# Altium PCB PCB1.PcbDoc (part 1 of 2)
Units mm, origin at the board's own origin, x right, y up, seen from the top; angles counter-clockwise.
Board outline 70 x 80 mm, 2 copper layers (Top Layer, Bottom Layer); 100 components, 100 nets, 458 pads, 124 vias.
Unrouted connection lines stored in the file: 1.
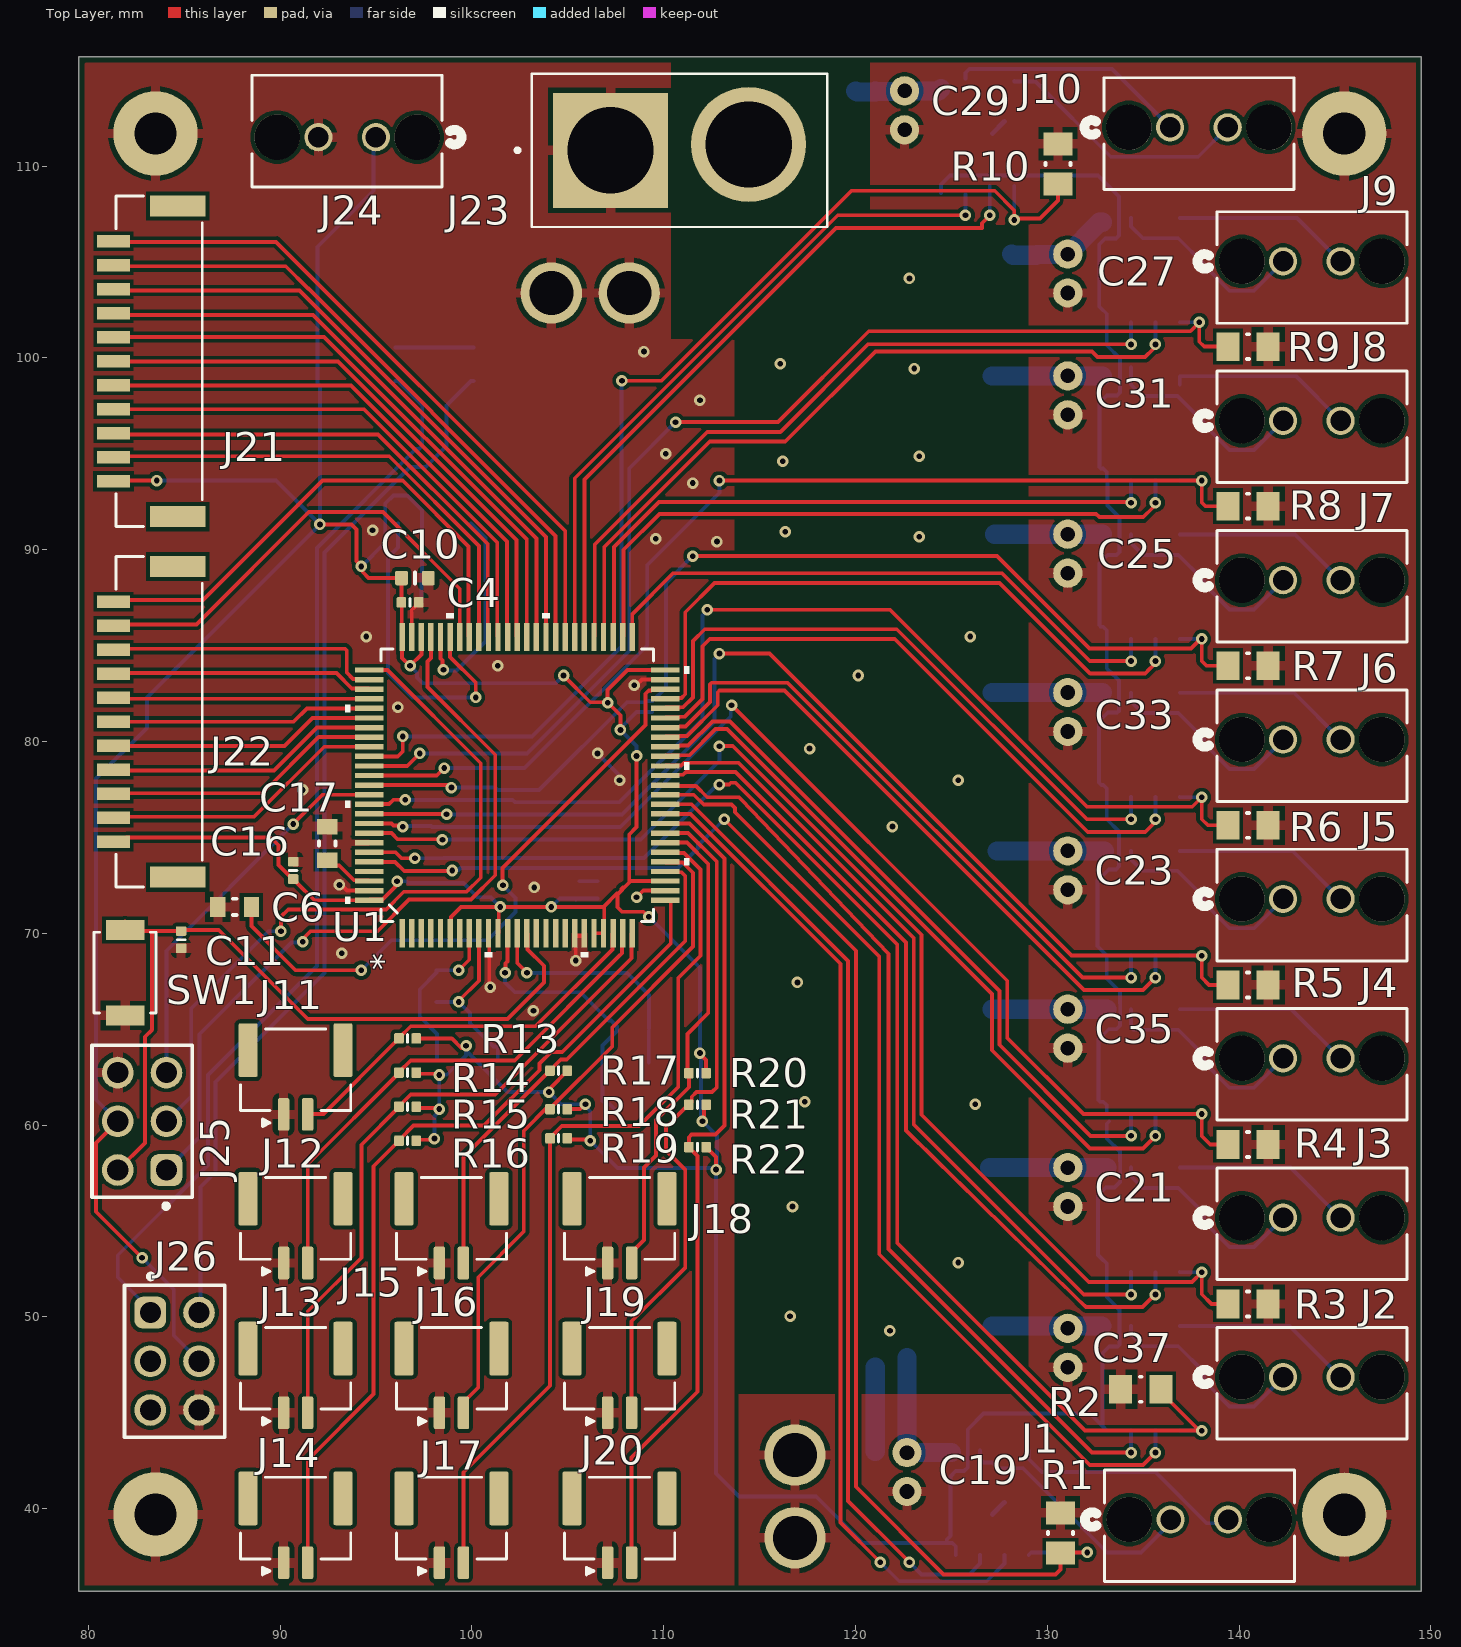
[diagram p0: Top Layer view]
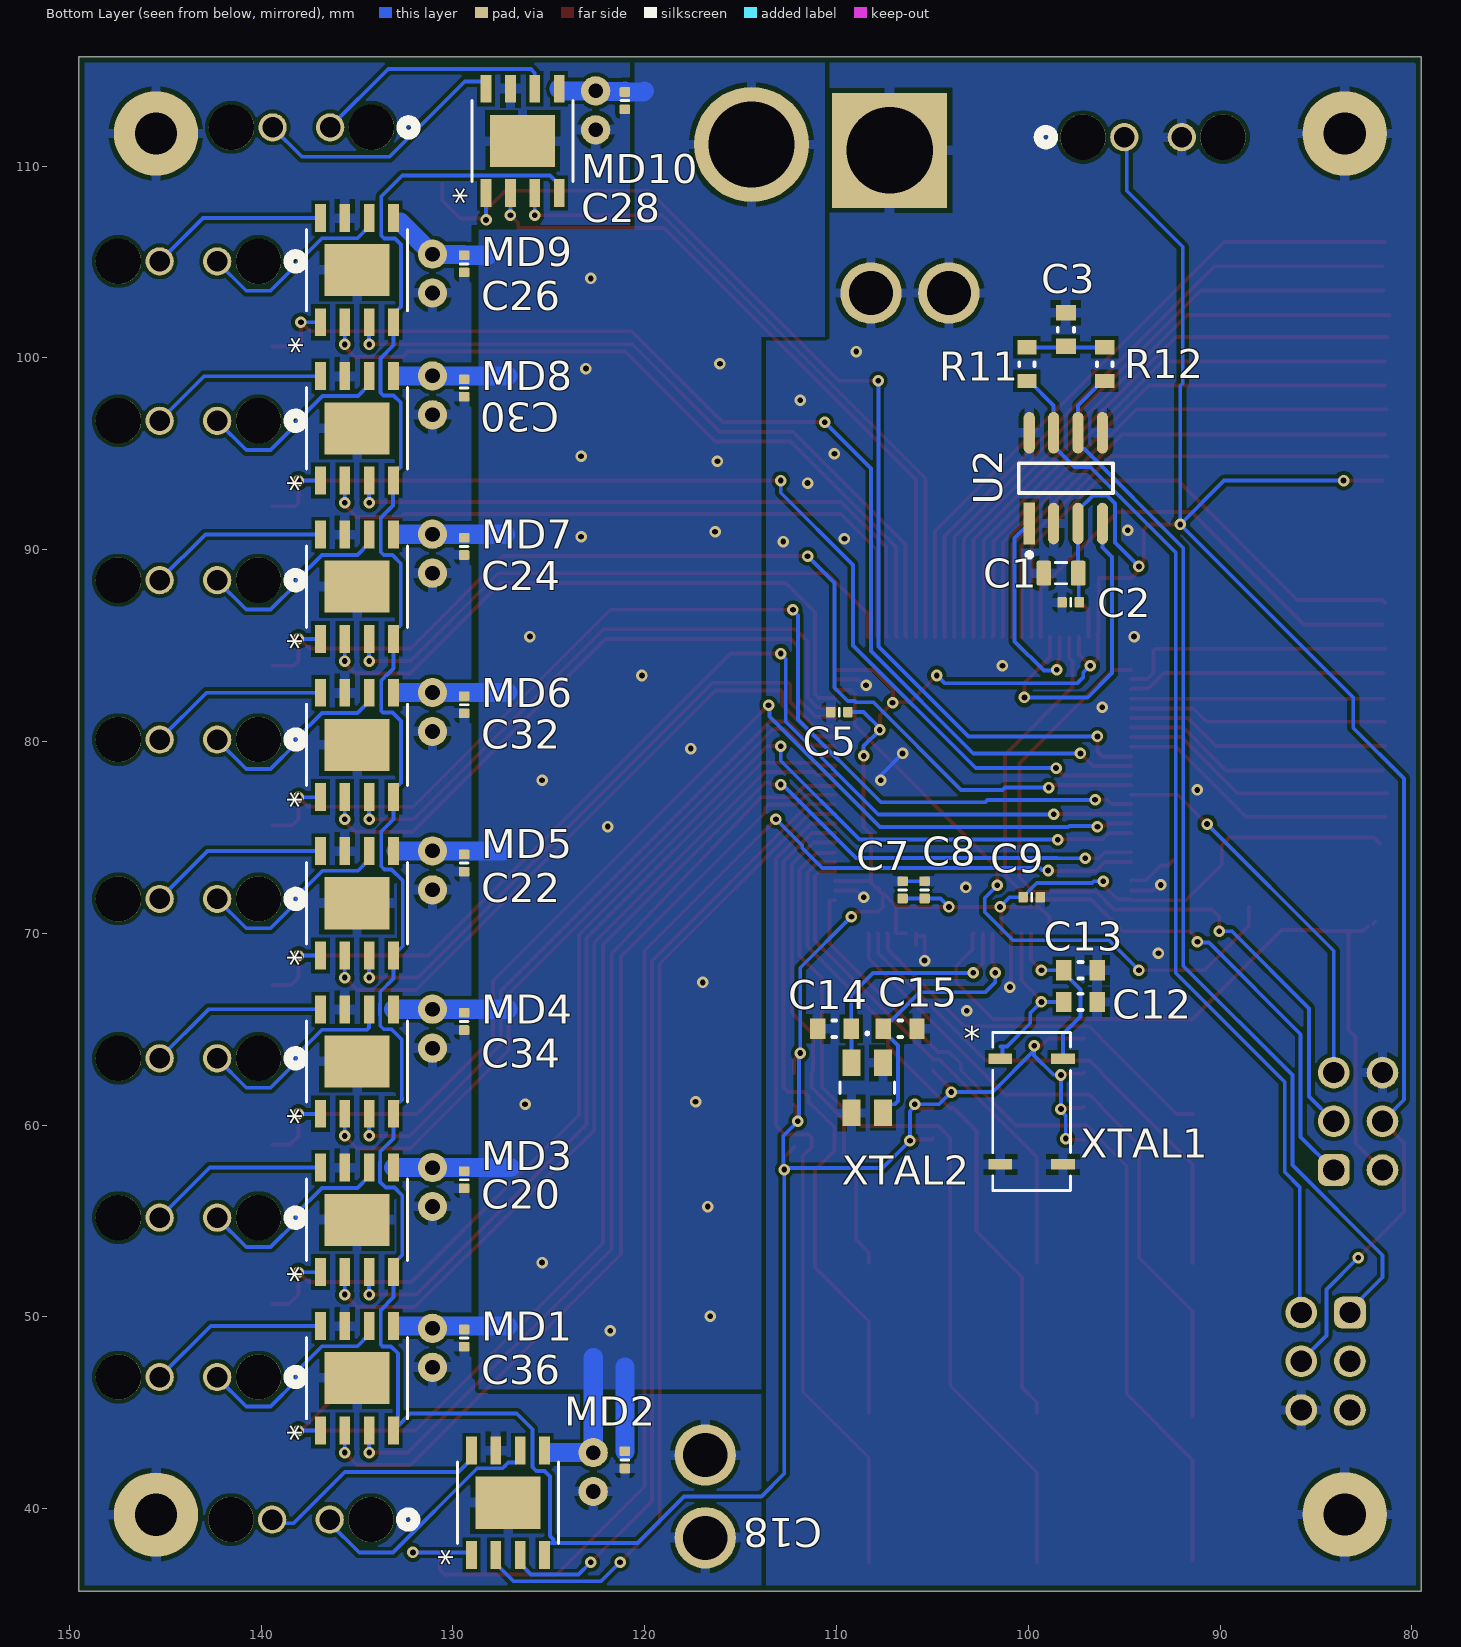
[diagram p1: Bottom Layer view, seen from below]
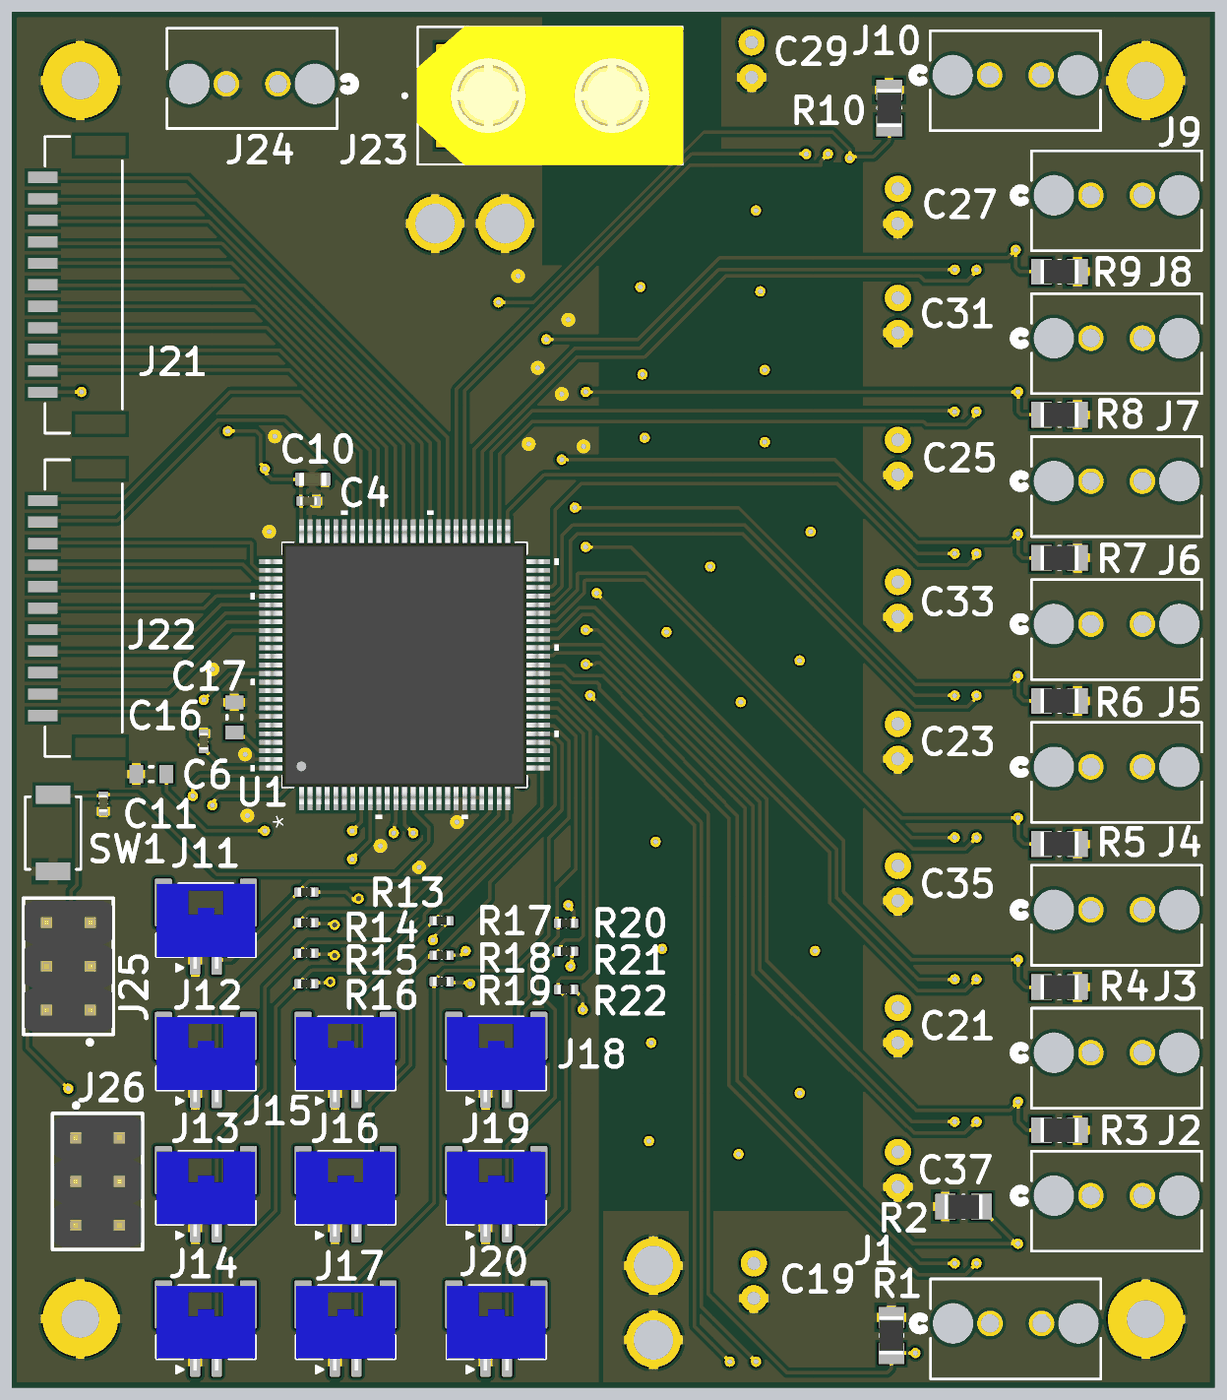
[diagram p3: 3D render of the assembled board from above, using the file's embedded part models]
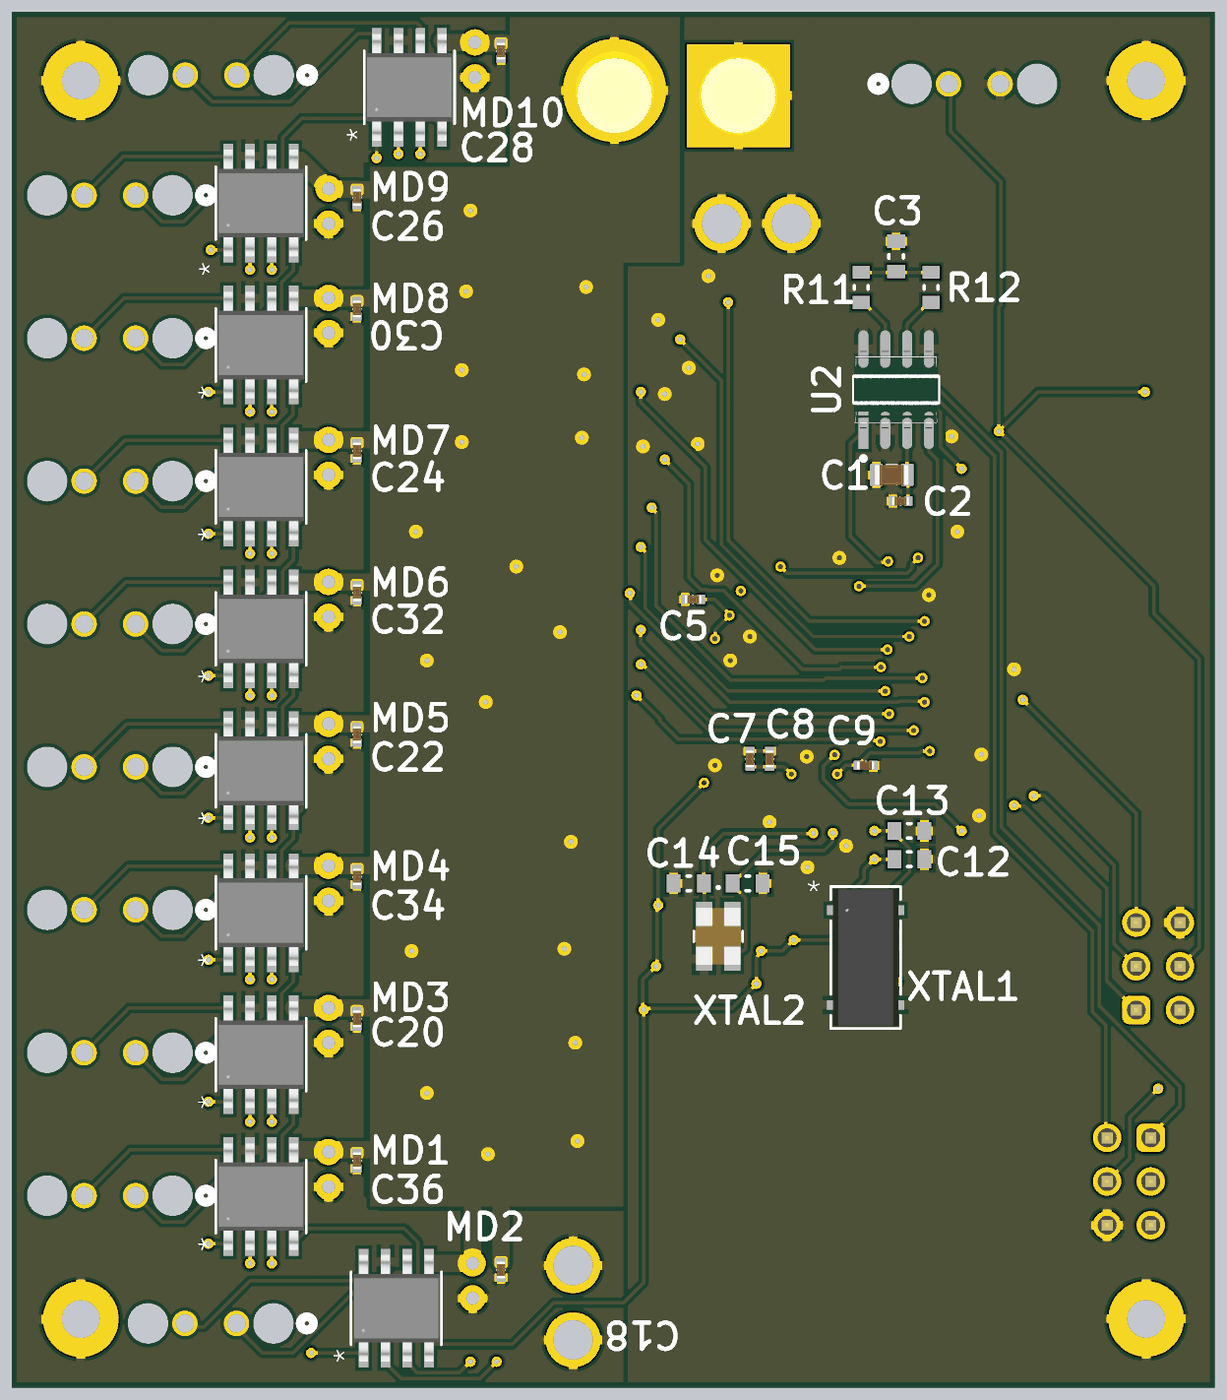
[diagram p4: 3D render of the assembled board from below, using the file's embedded part models]

## Layer stack, top to bottom
Top Solder: solder mask 0.0102, Solder Resist, Dk 3.5
Top Layer: signal copper 0.0356
Dielectric 1: dielectric 0.32, FR-4, Dk 4.8
Bottom Layer: signal copper 0.0356
Bottom Solder: solder mask 0.0102, Solder Resist, Dk 3.5

## Board outline
79.504,35.697 149.504,35.697 149.504,115.697 79.502,115.697

## Design rules (kind name [scope] priority, off if disabled: settings)
BoardOutlineClearance [All] p1: gap=0.3 ignorepadtopadclearanceinfootprint=FALSE except(0.4: Arc-SplitBarrior Arc-SplitContinuation Track-SplitBarrior Track-SplitContinuation SMDPad-SplitBarrior SMDPad-SplitContinuation THPad-SplitBarrior THPad-SplitContinuation Via-SplitBarrior Via-SplitContinuation Fill-SplitBarrior Fill-SplitContinuation Poly-SplitBarrior Poly-SplitContinuation Region-SplitBarrior Region-SplitContinuation Text-SplitBarrior Text-SplitContinuation)
Clearance "Clearance Different Nets" [All] p1: gap=0.2 ignorepadtopadclearanceinfootprint=FALSE except(0.1: Arc-Arc Arc-Track Arc-SMDPad Track-Track Track-SMDPad; 0.127: SMDPad-SMDPad SMDPad-Via THPad-Via Via-Via; 0.254: Arc-Via Arc-Text Track-Via Track-Text SMDPad-Text THPad-Text Via-Text Fill-Text Poly-Text Region-Text Text-Text; 0.5: THPad-THPad Via-Hole)
Clearance "Clearance Same Nets" [All] p2: gap=0.2 ignorepadtopadclearanceinfootprint=FALSE except(0.089: Arc-Arc Arc-Track Arc-SMDPad Track-Track Track-SMDPad SMDPad-SMDPad; 0.127: SMDPad-Via THPad-Via; 0.254: Arc-Via Arc-Text Track-Via Track-Text SMDPad-Text THPad-Text Via-Via Via-Text Fill-Text Poly-Text Region-Text Text-Text)
Clearance "Clearance Bottom Layer" [OnLayer('Bottom Layer')] p3: gap=0.203 ignorepadtopadclearanceinfootprint=TRUE except(0.254: Arc-Text Track-Text SMDPad-Text THPad-Text Via-Text Fill-Text Poly-Text Region-Text Text-Text)
Clearance "Clearance Top Layer" [OnLayer('Top Layer')] p4: gap=0.203 ignorepadtopadclearanceinfootprint=TRUE except(0.254: Arc-Text Track-Text SMDPad-Text THPad-Text Via-Text Fill-Text Poly-Text Region-Text Text-Text)
HoleSize [All] p1: absolutevalues=TRUE maxlimit=6.3 minlimit=0.3 maxpercent=80.000 minpercent=20.000
HoleToHoleClearance [All] p1: gap=0.25 allowstackedmicrovias=TRUE
MinimumAnnularRing [All] p1: minimumring=0.13
MinimumSolderMaskSliver [All] p1: minsoldermaskwidth=0
PolygonConnect PolygonConnect_1 [All] p1: thpad.connectstyle=Relief thpad.reliefconductorwidth=0.508 thpad.reliefentries=4 thpad.polygonreliefangle="90 Angle" thpad.airgapwidth=0.254 smdpad.connectstyle=Relief smdpad.reliefconductorwidth=0.508 smdpad.reliefentries=4 smdpad.polygonreliefangle="90 Angle" smdpad.airgapwidth=0.254 via.connectstyle=Direct via.reliefconductorwidth=0.508 via.reliefentries=4 via.polygonreliefangle="90 Angle" via.airgapwidth=0.254
RoutingCorners [All] p1: cornerstyle=Round minsetback=2.54 maxsetback=2.54
RoutingVias [All] p1: holewidth=0.3 width=0.6 viastyle="Through Hole" minholewidth=0.1 minwidth=0.5 maxholewidth=1 maxwidth=2
SilkToSilkClearance [All] p1: silktosilkclearance=0.1
SilkToSolderMaskClearance [IsPad] p1: minsilkscreentomaskgap=0.1 clearancetoexposedcopper=TRUE
SolderMaskExpansion [All] p1: expansion=0.102 istentingtop=FALSE
SupplyNets "Schematic Supply Nets_5" [InNet('12Va')] p1: voltage=0.000
SupplyNets "Schematic Supply Nets_3" [InNet('3.3V')] p2: voltage=0.000
SupplyNets "Schematic Supply Nets_2" [InNet('12V')] p3: voltage=0.000
SupplyNets "Schematic Supply Nets_1" [InNet('GND')] p4: voltage=0.000
SupplyNets "Schematic Supply Nets" [InNet('5V')] p5: voltage=0.000
Width [All] p1: maxlimit=2.54 minlimit=0.089 preferedwidth=0.2
24 further rules are at their usual default settings.

## Components (designator, comment, footprint, x,y, rotation, side; value= is the part's Value field where it differs from the comment)
C1 "Capacitor 10µF +/-20% 25V 0805" CAPC0805(2012)145_L 98.298,88.773 r0 bottom value=10µF
C2 "Capacitor 100nF +/-20% 50V 0402" CAPC0402(1005)60_L 97.79,87.249 r0 bottom value=100nF
C3 "yageo CC0603KRX7R9BB472" CAPC1709X04N 98.044,101.473 r90 bottom value=4.7nF
C4 "Capacitor 100nF +/-20% 50V 0402" CAPC0402(1005)60_L 96.774,87.249 r0 top value=100nF
C5 "Capacitor 100nF +/-20% 50V 0402" CAPC0402(1005)60_L 109.855,81.534 r0 bottom value=100nF
C6 "Capacitor 100nF +/-20% 50V 0402" CAPC0402(1005)60_L 90.678,73.279 r90 top value=100nF
C7 "Capacitor 100nF +/-20% 50V 0402" CAPC0402(1005)60_L 106.553,72.263 r90 bottom value=100nF
C8 "Capacitor 100nF +/-20% 50V 0402" CAPC0402(1005)60_L 105.41,72.263 r90 bottom value=100nF
C9 "Capacitor 100nF +/-20% 50V 0402" CAPC0402(1005)60_L 99.822,71.882 r180 bottom value=100nF
C10 "Capacitor 4.7µF +/-20% 10V 0603" CAPC0603(1608)100_L 97.028,88.519 r180 top value=4.7µF
C11 "Capacitor 100nF +/-20% 50V 0402" CAPC0402(1005)60_L 84.836,69.665 r90 top value=100nF
C12 "Yageo CC0603CRNPO9BN6R0" CAPC1709X04N 97.282,66.421 r180 bottom value=6pF
C13 "Yageo CC0603CRNPO9BN6R0" CAPC1709X04N 97.282,68.072 r180 bottom value=6pF
C14 "Yageo CC0603JRNPO9BN160" CAPC1709X04N 110.109,65.024 r0 bottom value=16pF
C15 "Yageo CC0603JRNPO9BN160" CAPC1709X04N 106.68,65.024 r0 bottom value=16pF
C16 "yageo CC0603KRX5R8BB225" CAPC1709X04N 87.63,71.374 r180 top value=2.2µF
C17 "yageo CC0603KRX5R8BB225" CAPC1709X04N 92.456,74.676 r90 top value=2.2µF
C18 "Capacitor 100nF +/-20% 50V 0402" CAPC0402(1005)60_L 121.031,42.545 r270 bottom value=100nF
C19 "N18F1D473MQ0T0S0N0" N18F1D473MQ0T0S0N0-Footprint-1 122.682,40.894 r90 top value=47µF
C20 "Capacitor 100nF +/-20% 50V 0402" CAPC0402(1005)60_L 129.413,57.15 r270 bottom value=100nF
C21 "N18F1D473MQ0T0S0N0" N18F1D473MQ0T0S0N0-Footprint-1 131.064,55.753 r90 top value=47µF
C22 "Capacitor 100nF +/-20% 50V 0402" CAPC0402(1005)60_L 129.413,73.66 r270 bottom value=100nF
C23 "N18F1D473MQ0T0S0N0" N18F1D473MQ0T0S0N0-Footprint-1 131.064,72.263 r90 top value=47µF
C24 "Capacitor 100nF +/-20% 50V 0402" CAPC0402(1005)60_L 129.413,90.17 r270 bottom value=100nF
C25 "N18F1D473MQ0T0S0N0" N18F1D473MQ0T0S0N0-Footprint-1 131.064,88.773 r90 top value=47µF
C26 "Capacitor 100nF +/-20% 50V 0402" CAPC0402(1005)60_L 129.413,104.902 r270 bottom value=100nF
C27 "N18F1D473MQ0T0S0N0" N18F1D473MQ0T0S0N0-Footprint-1 131.064,103.378 r90 top value=47µF
C28 "Capacitor 100nF +/-20% 50V 0402" CAPC0402(1005)60_L 121.031,113.411 r270 bottom value=100nF
C29 "N18F1D473MQ0T0S0N0" N18F1D473MQ0T0S0N0-Footprint-1 122.555,111.887 r90 top value=47µF
C30 "Capacitor 100nF +/-20% 50V 0402" CAPC0402(1005)60_L 129.413,98.425 r270 bottom value=100nF
C31 "N18F1D473MQ0T0S0N0" N18F1D473MQ0T0S0N0-Footprint-1 131.064,97.028 r90 top value=47µF
C32 "Capacitor 100nF +/-20% 50V 0402" CAPC0402(1005)60_L 129.413,81.915 r270 bottom value=100nF
C33 "N18F1D473MQ0T0S0N0" N18F1D473MQ0T0S0N0-Footprint-1 131.064,80.518 r90 top value=47µF
C34 "Capacitor 100nF +/-20% 50V 0402" CAPC0402(1005)60_L 129.413,65.405 r270 bottom value=100nF
C35 "N18F1D473MQ0T0S0N0" N18F1D473MQ0T0S0N0-Footprint-1 131.064,64.008 r90 top value=47µF
C36 "Capacitor 100nF +/-20% 50V 0402" CAPC0402(1005)60_L 129.413,48.895 r270 bottom value=100nF
C37 "N18F1D473MQ0T0S0N0" N18F1D473MQ0T0S0N0-Footprint-1 131.064,47.371 r90 top value=47µF
J1 "Molex 436500218" CONN_SD-43650-007_02_MOL 137.922,39.116 r180 top
J2 "Molex 436500218" CONN_SD-43650-007_02_MOL 143.788,46.544 r180 top
J3 "Molex 436500218" CONN_SD-43650-007_02_MOL 143.788,54.854 r180 top
J4 "Molex 436500218" CONN_SD-43650-007_02_MOL 143.788,63.163 r180 top
J5 "Molex 436500218" CONN_SD-43650-007_02_MOL 143.788,71.473 r180 top
J6 "Molex 436500218" CONN_SD-43650-007_02_MOL 143.788,79.782 r180 top
J7 "Molex 436500218" CONN_SD-43650-007_02_MOL 143.788,88.091 r180 top
J8 "Molex 436500218" CONN_SD-43650-007_02_MOL 143.788,96.401 r180 top
J9 "Molex 436500218" CONN_SD-43650-007_02_MOL 143.788,104.71 r180 top
J10 "Molex 436500218" CONN_SD-43650-007_02_MOL 137.898,111.695 r180 top
J11 "THERMISTOR1" JST-BM02B-GHS-TBT_V 90.805,62.23 r0 top
J12 "THERMISTOR2" JST-BM02B-GHS-TBT_V 90.805,54.483 r0 top
J13 "THERMISTOR3" JST-BM02B-GHS-TBT_V 90.805,46.672 r0 top
J14 "THERMISTOR4" JST-BM02B-GHS-TBT_V 90.805,38.862 r0 top
J15 "THERMISTOR5" JST-BM02B-GHS-TBT_V 98.933,54.483 r0 top
J16 "THERMISTOR6" JST-BM02B-GHS-TBT_V 98.933,46.672 r0 top
J17 "THERMISTOR7" JST-BM02B-GHS-TBT_V 98.933,38.862 r0 top
J18 "THERMISTOR8" JST-BM02B-GHS-TBT_V 107.696,54.483 r0 top
J19 "THERMISTOR9" JST-BM02B-GHS-TBT_V 107.696,46.672 r0 top
J20 "THERMISTOR10" JST-BM02B-GHS-TBT_V 107.696,38.862 r0 top
J21 "BM11B-GHS-TBTLFSNN" CONN11_BM11B-GHS-TBTLFSNN_JST 83.693,99.822 r270 top
J22 "BM11B-GHS-TBTLFSNN" CONN11_BM11B-GHS-TBTLFSNN_JST 83.693,81.026 r270 top
J23 "XT60" AMASS_XT60PB-M 110.827,110.82 r0 top
J24 "Molex 436500218" CONN_SD-43650-007_02_MOL 93.496,111.825 r0 top
J25 "61300621121" 61300621121 82.804,60.198 r90 top
J26 "61300621121" 61300621121 84.502,47.687 r270 top
MD1 "DRV8231ADDAR" SOIC-8-DDA-DRV8231_TEX 127.127,40.313 r90 bottom
MD2 "DRV8231ADDAR" SOIC-8-DDA-DRV8231_TEX 135.001,46.809 r90 bottom
MD3 "DRV8231ADDAR" SOIC-8-DDA-DRV8231_TEX 135.001,55.061 r90 bottom
MD4 "DRV8231ADDAR" SOIC-8-DDA-DRV8231_TEX 135.001,63.313 r90 bottom
MD5 "DRV8231ADDAR" SOIC-8-DDA-DRV8231_TEX 135.001,71.566 r90 bottom
MD6 "DRV8231ADDAR" SOIC-8-DDA-DRV8231_TEX 135.001,79.818 r90 bottom
MD7 "DRV8231ADDAR" SOIC-8-DDA-DRV8231_TEX 135.001,88.071 r90 bottom
MD8 "DRV8231ADDAR" SOIC-8-DDA-DRV8231_TEX 135.001,96.323 r90 bottom
MD9 "DRV8231ADDAR" SOIC-8-DDA-DRV8231_TEX 135.001,104.575 r90 bottom
MD10 "DRV8231ADDAR" SOIC-8-DDA-DRV8231_TEX 126.365,111.306 r90 bottom
R1 "Resistor 10k +/-1% 0805 125 mW" RESC2013X50X35ML15T15 130.683,38.735 r270 top value=604Ω
R2 "Resistor 10k +/-1% 0805 125 mW" RESC2013X50X35ML15T15 134.874,46.228 r0 top value=604Ω
R3 "Resistor 10k +/-1% 0805 125 mW" RESC2013X50X35ML15T15 140.462,50.673 r180 top value=604Ω
R4 "Resistor 10k +/-1% 0805 125 mW" RESC2013X50X35ML15T15 140.462,58.991 r180 top value=604Ω
R5 "Resistor 10k +/-1% 0805 125 mW" RESC2013X50X35ML15T15 140.462,67.31 r180 top value=604Ω
R6 "Resistor 10k +/-1% 0805 125 mW" RESC2013X50X35ML15T15 140.462,75.629 r180 top value=604Ω
R7 "Resistor 10k +/-1% 0805 125 mW" RESC2013X50X35ML15T15 140.462,83.947 r180 top value=604Ω
R8 "Resistor 10k +/-1% 0805 125 mW" RESC2013X50X35ML15T15 140.462,92.266 r180 top value=604Ω
R9 "Resistor 10k +/-1% 0805 125 mW" RESC2013X50X35ML15T15 140.462,100.584 r180 top value=604Ω
R10 "Resistor 10k +/-1% 0805 125 mW" RESC2013X50X35ML15T15 130.556,110.109 r270 top value=604Ω
R11 "yageo RC0603FR-0760R4L" RESC1709X04N 100.076,99.67 r270 bottom value=60.4
R12 "yageo RC0603FR-0760R4L" RESC1709X04N 96.012,99.67 r90 bottom value=60.4
R13 "10R2F" RESC0402(1005)_L 96.647,64.516 r0 top value=10KΩ
R14 "10R2F" RESC0402(1005)_L 96.647,62.738 r0 top value=10KΩ
R15 "10R2F" RESC0402(1005)_L 96.647,60.96 r0 top value=10KΩ
R16 "10R2F" RESC0402(1005)_L 96.647,59.182 r0 top value=10KΩ
R17 "10R2F" RESC0402(1005)_L 104.521,62.84 r0 top value=10KΩ
R18 "10R2F" RESC0402(1005)_L 104.521,60.833 r0 top value=10KΩ
R19 "10R2F" RESC0402(1005)_L 104.521,59.309 r0 top value=10KΩ
R20 "10R2F" RESC0402(1005)_L 111.76,62.713 r0 top value=10KΩ
R21 "10R2F" RESC0402(1005)_L 111.76,61.062 r0 top value=10KΩ
R22 "10R2F" RESC0402(1005)_L 111.76,58.852 r0 top value=10KΩ
SW1 "TS-1088R-02026" SW_TS-1088R-02026_XNP 81.915,67.945 r270 top
U1 "STM32H523VET6" LQFP-100 102.362,77.724 r90 top
U2 "TCAN334GDR" FP-D0008A-IPC_B 98.044,93.726 r90 bottom
XTAL1 "ECS-.327-6-17X-TR" XTAL_7X-TR_ECS 99.822,60.706 r180 bottom
XTAL2 "X322525MOB4SI" SMT_MOB4SI_YXC 108.395,61.941 r270 bottom

## Footprints (in the part's own frame and the unit in brackets; to place one, negate y for a bottom-side part, rotate by r counter-clockwise, add the part's x,y. Pads: shape width x height; smd on the part's side, far side on the other; paste and mask are expansions set on the pad)
61300621121 [mm] "Pin Header, pitch 2.54 mm, THT, Vertical, dual row, 6p"
  rrect50% 1.65x1.65 hole 1.1: 1(-2.54,-1.27)
  round 1.65 hole 1.1: 2(-2.54,1.27) 3(0,-1.27) 4(0,1.27) 5(2.54,-1.27) 6(2.54,1.27)
  silkscreen extent -4.54,-2.62 3.96,2.62, body extent -3.81,-2.54 3.81,2.54, height 8.59
AMASS_XT60PB-M [mm]
  rect 6x6 / inner round 6 / far side rect 6x6 hole 4.5: 1(-3.6,0)
  round 6 hole 4.5: 2(3.6,0.305)
  silkscreen extent -8.55,-4 7.7,4, body extent -7.75,-4.05 7.75,4.05, height 16
CAPC0402(1005)60_L [mm] "Chip Capacitor, Body 1.0x0.5mm, Height 0.6mm, IPC High Density"
  rrect25% 0.5x0.55 smd: 1(-0.45,0) 2(0.45,0)
  silkscreen extent 0,-0.2 0,0.2, body extent -0.5,-0.25 0.5,0.25, height 0.6
CAPC0603(1608)100_L [mm] "Chip Capacitor, Body 1.6x0.8mm, Height 1.0mm, IPC High Density"
  rrect25% 0.66x0.76 smd: 1(-0.7,0) 2(0.7,0)
  silkscreen extent 0,-0.3 0,0.3, body extent -0.8,-0.4 0.8,0.4, height 0.95
CAPC0805(2012)145_L [mm] "Chip Capacitor, Body 2.0x1.2mm, Height 1.45mm, IPC High Density"
  rrect25% 0.76x1.3 smd: 1(-0.9,0) 2(0.89,0)
  silkscreen extent -0.3,-0.55 0.3,0.55, body extent -1,-0.6 1,0.6, height 1.45
CAPC1709X04N [mm] "Chip Capacitor, 2-Leads, Body 1.70x0.90mm, IPC Medium Density"
  rect 0.8x1.05 smd: 1(-0.875,0) 2(0.875,0)
  silkscreen extent -0.1,-0.43 0.1,0.43, body extent -0.9,-0.5 0.9,0.5, height 0.45
CONN11_BM11B-GHS-TBTLFSNN_JST [mm]
  rect 0.65x1.7 smd paste+0 mask+0: 1(-6.25,-2.379) 2(-5,-2.379) 3(-3.75,-2.379) 4(-2.5,-2.379) 5(-1.25,-2.379) 6(0,-2.379) 7(1.25,-2.379) 8(2.5,-2.379) 9(3.75,-2.379) 10(5,-2.379) 11(6.25,-2.379)
  rect 1.1x2.9 smd paste-1.45 mask-1.448: 12(-8.1,0.971) 13(8.1,0.971)
  silkscreen extent -8.62,-2.25 8.62,2.25
CONN_SD-43650-007_02_MOL [mil]
  round 58 / inner round 60 / far side round 58 hole 42 paste-99999 mask+0: 1(59.06,-12.55) 2(-59.06,-12.55)
  round 93 / inner round 60 / far side round 93 hole 93 unplated paste-99999 mask+0: 3(-143.7,-12.55) 4(143.7,-12.55)
  silkscreen extent -195,-115 235,115
FP-D0008A-IPC_B [mm]
  rect 2.169x0.582 smd paste+0 mask+0: 1(-2.364,1.905)
  rrect100% 2.169x0.582 smd paste+0 mask+0: 2(-2.364,0.635) 3(-2.364,-0.635) 4(-2.364,-1.905) 5(2.364,-1.905) 6(2.364,-0.635) 7(2.364,0.635) 8(2.364,1.905)
  silkscreen extent -4.12,-2.45 0.78,2.45, body extent -3,-2.45 3,2.45, height 1.75
JST-BM02B-GHS-TBT_V [mm] "Connector, 2-Leads, Body 5.75x4.25mm, Pitch 1.25mm"
  rrect30% 0.6x1.7 smd: 1(-0.625,-1.675) 2(0.625,-1.675)
  rrect20% 1x2.8 smd: MP1(-2.475,1.675) MP2(2.475,1.675)
  silkscreen extent -2.88,-2.31 2.88,2.78, body extent -2.88,-2.18 2.87,2.77, height 4.21
LQFP-100 [mil]
  rect 58x11 smd paste+0 mask+0: 1(-304,236.22) 2(-304,216.54) 3(-304,196.85) 4(-304,177.17) 5(-304,157.48) 6(-304,137.8) 7(-304,118.11) 8(-304,98.43) 9(-304,78.74) 10(-304,59.06) 11(-304,39.37) 12(-304,19.69) 13(-304,0) 14(-304,-19.68) 15(-304,-39.37) 16(-304,-59.06) 17(-304,-78.74) 18(-304,-98.43) 19(-304,-118.11) 20(-304,-137.8) 21(-304,-157.48) 22(-304,-177.17) 23(-304,-196.85) 24(-304,-216.54) 25(-304,-236.22) 51(304,-236.22) 52(304,-216.54) 53(304,-196.85) 54(304,-177.17) 55(304,-157.48) 56(304,-137.8) 57(304,-118.11) 58(304,-98.43) 59(304,-78.74) 60(304,-59.06) 61(304,-39.37) 62(304,-19.68) 63(304,0) 64(304,19.68) 65(304,39.37) 66(304,59.06) 67(304,78.74) 68(304,98.43) 69(304,118.11) 70(304,137.8) 71(304,157.48) 72(304,177.17) 73(304,196.85) 74(304,216.54) 75(304,236.22)
  rect 11x58 smd paste+0 mask+0: 26(-236.22,-304) 27(-216.54,-304) 28(-196.85,-304) 29(-177.17,-304) 30(-157.48,-304) 31(-137.8,-304) 32(-118.11,-304) 33(-98.43,-304) 34(-78.74,-304) 35(-59.06,-304) 36(-39.37,-304) 37(-19.68,-304) 38(0,-304) 39(19.68,-304) 40(39.37,-304) 41(59.06,-304) 42(78.74,-304) 43(98.43,-304) 44(118.11,-304) 45(137.8,-304) 46(157.48,-304) 47(177.17,-304) 48(196.85,-304) 49(216.54,-304) 50(236.22,-304) 76(236.22,304) 77(216.54,304) 78(196.85,304) 79(177.17,304) 80(157.48,304) 81(137.8,304) 82(118.11,304) 83(98.43,304) 84(78.74,304) 85(59.06,304) 86(39.37,304) 87(19.68,304) 88(0,304) 89(-19.68,304) 90(-39.37,304) 91(-59.06,304) 92(-78.74,304) 93(-98.43,304) 94(-118.11,304) 95(-137.8,304) 96(-157.48,304) 97(-177.17,304) 98(-196.85,304) 99(-216.54,304) 100(-236.22,304)
  silkscreen extent -353,-353 353,353, body extent -319,-319 319,319, height 63
N18F1D473MQ0T0S0N0-Footprint-1 [mil]
  round 60 hole 30: 1(0,0) 2(80,0)
RESC0402(1005)_L [mm] "Chip Resistor, Body 1.0x0.5mm, IPC High Density"
  rrect25% 0.5x0.55 smd: 1(-0.45,0) 2(0.45,0)
  silkscreen extent 0,-0.2 0,0.2, body extent -0.5,-0.25 0.5,0.25, height 0.3
RESC1709X04N [mm] "Chip Resistor, 2-Leads, Body 1.70x0.90mm, IPC Medium Density"
  rect 0.75x1 smd: 1(-0.875,0) 2(0.875,0)
  silkscreen extent -0.1,-0.4 0.1,0.4, body extent -0.9,-0.5 0.9,0.5, height 0.45
RESC2013X50X35ML15T15 [mm] "Chip Resistor, 2-Leads, Body 2.2x1.4mm, IPC Low Density"
  rect 1.2x1.5 smd: 1(-1.05,0) 2(1.05,0)
  silkscreen extent -0.05,-0.65 0.05,0.65, body extent -1.1,-0.7 1.1,0.7, height 0.5
SMT_MOB4SI_YXC [mm]
  rect 1.391x0.94 smd paste+0 mask+0: 1(-1.305,-0.825) 2(1.305,-0.825) 3(1.305,0.825) 4(-1.305,0.825)
  silkscreen extent -2.92,-1.42 0.3,1.42, body extent -1.65,-1.32 1.65,1.32, height 0.81
SOIC-8-DDA-DRV8231_TEX [mil]
  rect 57.28x21.97 smd paste+0 mask+0: 1(-107.14,75) 2(-107.14,25) 3(-107.14,-25) 4(-107.14,-75) 5(107.14,-75) 6(107.14,-25) 7(107.14,25) 8(107.14,75)
  rect 107x134 smd paste-66.5 mask+0: EPAD(0,0)
  silkscreen extent -84,-104 84,104, body extent -122,-99 122,99, height 67
SW_TS-1088R-02026_XNP [mil]
  rect 41x79 smd paste+0 mask+0: 1(-87.6,0) 2(87.6,0)
  silkscreen extent -83,-64 83,64
XTAL_7X-TR_ECS [mm]
  rect 1.239x0.558 smd paste+0 mask+0: 1(-1.635,2.75) 2(-1.635,-2.75) 3(1.635,-2.75) 4(1.635,2.75)
  silkscreen extent -2.03,-4.13 2.03,4.13, body extent -1.91,-4 1.91,4, height 2.49

## Part data
C1: library part CMP-001-00079-4, "Chip Capacitor, 10µF +/-20%, 25V, 0805, Thickness 1.45 mm", Case/Package=0805, Max Operating Temperature=85°C, Min Operating Temperature=-55°C, Tolerance=10%, Voltage Rating=25V, Mounting Technology=SMT, Pins=2
C2 C4 C5 C6 C7 C8 C9 C11 C18 C20 C22 C24 C26 C28 C30 C32 C34 C36: library part CMP-001-00067-3, "Chip Capacitor, 100nF +/-20%, 50V, 0402, Thickness 0.6 mm", Case/Package=0402, Max Operating Temperature=85°C, Min Operating Temperature=-55°C, Tolerance=10%, Voltage Rating=50V, Mounting Technology=SMT, Pins=2
C3: library part CMP-001-00083-3, "Ceramic Capacitor, Multilayer, Ceramic, 50V, 10% +Tol, 10% -Tol, X7R, 15% TC, 0.0047uF, Surface Mount, 0603", Capacitor Type=Ceramic, Case/Package=0603, Max Operating Temperature=125°C, Min Operating Temperature=-55°C, Mounting Technology="Surface Mount", Pins=2, RoHS Compliant=Yes
C10: library part CMP-001-00076-4, "Chip Capacitor, 4.7µF +/-20%, 10V, 0603, Thickness 1 mm", Case/Package=0603, Max Operating Temperature=85°C, Min Operating Temperature=-55°C, Tolerance=10%, Voltage Rating=10V, Mounting Technology=SMT, Pins=2
C12 C13: library part CMP-001-00085-2, "Ceramic Capacitor, Multilayer, Ceramic, 50V, 4.17% +Tol, 4.17% -Tol, C0G, -/+30ppm/Cel TC, 0.000006uF, Surface Mount, 0603", Capacitor Type=Ceramic, Case/Package=0603, Max Operating Temperature=125°C, Min Operating Temperature=-55°C, Mounting Technology="Surface Mount", Pins=2, RoHS Compliant=Yes
C14 C15: library part CMP-001-00087-3, "Multilayer Ceramic Capacitor, 16 pF, 50 V, ± 5%, C0G (NP0), 0603 [1608 Metric]"
C16 C17: library part CMP-001-00088-2, "Ceramic Capacitor, Multilayer, Ceramic, 25V, 10% +Tol, 10% -Tol, X5R, 15% TC, 2.2uF, Surface Mount, 0603", Capacitor Type=Ceramic, Case/Package=0603, Max Operating Temperature=85°C, Min Operating Temperature=-55°C, Mounting Technology="Surface Mount", Pins=2, RoHS Compliant=Yes
C19 C21 C23 C25 C27 C29 C31 C33 C35 C37: library part CMP-001-00089-5, "±20% 47nF Y5V 1kV Plugin, P=10mm Through Hole Ceramic Capacitors ROHS"
J1 J2 J3 J4 J5 J6 J7 J8 J9 J10 J24: library part CMP-014-000000-7, "No Description Available", Mfr_Name="Molex Connector Corporation", Design Item ID=436500218, RefDes=RefDes, Source=436500218.SchLib, Type=Type
J11 J12 J13 J14 J15 J16 J17 J18 J19 J20: library part CMP-002-00061-3, "Disconnectable Crimp Style Connector, Pitch 1.25 mm, 1 x 2 Position, Height 4.05 mm, -25 to 85 degC, RoHS, Tape and Reel", Case/Package="Disconnectable Crimp Style Connector, Pitch 1.25 mm, 1 x 2 Position, Height 4.05 mm", Connector Type=Header,Shrouded, Mounting Technology=SurfaceMount, Pins=4
J21 J22: library part CMP-168-000000-2, "No Description Available", Manufacturer_Name=JST, Manufacturer_Part_Number=BM11B-GHS-TBT(LF)(SN)(N), Copyright="Copyright (C) 2025 Ultra Librarian. All rights reserved.", Design Item ID=BM11B-GHS-TBTLFSNN, RefDes=RefDes, Source=BM11B-GHS-TBTLFSNN.SchLib, Type=Type
J23: library part CMP-011-000000-3, "Power connector; 65A; PIN: 2; Colour: yellow", Package=None, Availability="Not in stock", Check_prices=https://www.snapeda.com/parts/XT60%20YELLOW/Pololu/view-part/?ref=eda, Component Type=Standard, Design Item ID=XT60_YELLOW, MF=Pololu, MP="XT60 YELLOW", Pin Count=2, Price=None, SnapEDA_Link=https://www.snapeda.com/parts/XT60%20YELLOW/Pololu/view-part/?ref=snap, Source=XT60_YELLOW.SchLib
J25 J26: library part CMP-002-00076-2, "WR-PHD Pin Header, THT, Vertical, pitch 2.54mm, 2 Row, 6P", Contact Resistance=20mOhm, Manufacturer="Wurth Elektronik", Operating Temperature Max=105°C, Operating Temperature Min=-40°C, Rated Current=3A, Withstanding Voltage=500V, Working Voltage=250V, Category="Board-to-Board Connectors", Component Type=Standard, ComponentLink1Description="Website Link", ComponentLink1URL=https://www.we-online.com/redexpert/article/61300621121?ad, ComponentLink2Description="Datasheet Link", ComponentLink2URL=https://www.we-online.com/redexpert/spec/61300621121?ad, Design Item ID=61300621121, Gender="Pin Header", Manufacturer Part Number=61300621121, Match Code=WR-PHD, Mount="Through Hole", Number of Rows=2, Orientation=Vertical, Packaging=Bag, Pin Count=6, Pins=6, Pitch=2.54mm, Source=WR-PHD.SchLib
MD1 MD2 MD3 MD4 MD5 MD6 MD7 MD8 MD9 MD10: library part CMP-003-000001-2, "No Description Available", Mfr_Name="Texas Instruments", Component Type=Standard, Design Item ID=DRV8231ADDAR, Pin Count=9, RefDes=abcdef, Source=DRV8231ADDAR.SchLib, Type=Type
R1 R2 R3 R4 R5 R6 R7 R8 R9 R10: library part CMP-009-00018-5, "Chip Resistor, 10 KOhm, +/- 1%, 125 mW, -55 to 155 degC, 0805 (2012 Metric)", Case/Package=0805, Max Operating Temperature=155°C, Min Operating Temperature=-55°C, Power=125mW, Tolerance=1%, Voltage Rating=150V, Mounting Technology=SM, Pins=2, RoHS Compliant=True
R11 R12: library part CMP-009-00177-3, "Fixed Resistor, Metal Glaze/thick Film, 0.1W, 60.4ohm, 75V, 1% +/-Tol, 100ppm/Cel, Surface Mount, 0603", Case/Package=0603, Max Operating Temperature=155°C, Min Operating Temperature=-55°C, Power=100mW, Tolerance=1%, Mounting Technology="Surface Mount", Pins=2, RoHS Compliant=Yes
R13 R14 R15 R16 R17 R18 R19 R20 R21 R22: library part CMP-009-00067-2, "10R 0.063W 1% 0402 (1005 Metric)  SMD", Case/Package=0402, Power=63mW, Tolerance=1%, Mounting Technology=SMT, Pins=2
SW1: library part CMP-011-00013-2, "No Description Available", Manufacturer_Name=Xunpu, Copyright="Copyright (C) 2025 Ultra Librarian. All rights reserved.", Design Item ID=TS-1088R-02026, Manufacturer_Part_Number=TS-1088R-02026, Source=TS-1088R-02026.SchLib, Type="Tactile Switches"
U1: library part CMP-006-000002-1, "No Description Available", Mfr_Name=STMicroelectronics, Design Item ID=STM32H523VET6, RefDes=RefDes, Source=STM32H523VET6.SchLib, Type=Type
U2: library part CMP-015-00009-1, "Interface Circuit, PDSO8", Case/Package=SOP, Max Operating Temperature=125°C, Min Operating Temperature=-40°C, Nominal Supply Voltage=3.3V, Pins=8, RoHS Compliant=Yes
XTAL1: library part CMP-036-000000-1, "No Description Available", Manufacturer_Name="ECS International", Copyright="Copyright (C) 2025 Ultra Librarian. All rights reserved.", Design Item ID=ECS-.327-6-17X-TR, Manufacturer_Part_Number=ECS-.327-6-17X-TR, RefDes=RefDes, Source=ECS-P327-6-17X-TR.SchLib, Type=Type
XTAL2: library part CMP-039-000000-5, "No Description Available", Frequency=25MHz, Manufacturer_Name=YXC, Copyright="Copyright (C) 2025 Ultra Librarian. All rights reserved.", Design Item ID=X322525MOB4SI, Manufacturer_Part_Number=X322525MOB4SI, RefDes=RefDes, Source=X322525MOB4SI.SchLib, Type=Type

## Free pads (board coordinates)
  round 4.4 hole 2.2: 1(83.502,39.697) 1(83.502,111.697) 1(145.479,39.687) 1(145.479,111.697)
  round 3.2 hole 2.3: 1(104.14,103.378) 1(108.204,103.378) 1(116.84,38.481) 1(116.84,42.799)

## Via types
v1: diameter 0.6, hole 0.3, Top Layer to Bottom Layer, 124 vias

## Nets (pads, with @x,y where several pads share a name; then routed paths per layer and width w, separated by ;. In a path a pad name is that pad's centre, name@x,y a point inside that pad or via, vN(x,y) a via of type N, cw(c..) or ccw(c..) an arc to the next point about the centre after c; other vN are vias at no path point)
3.3V: C1.1 C2.1 C4.1 C5.1 C6.1 C7.1 C8.1 C9.1 C10.2 J21.11 J22.11 J24.1 J25.4 J26.4 MD1.4 MD2.4 MD3.4 MD4.4 MD5.4 MD6.4 MD7.4 MD8.4 MD9.4 MD10.4 R13.2 R14.2 R15.2 R16.2 R17.2 R18.2 R19.2 R20.2 R21.2 R22.2 U1.6 U1.11 U1.21 U1.22 U1.28 U1.50 U1.73 U1.75 U1.100 U2.3 | length 359.7
  Top Layer w0.2: J25.4@81.28,60.198 81.28,59.944 80.409,59.073 80.409,55.481 v1(82.804,53.086) ; J21.11@81.534,93.599 v1(83.566,93.599) ; J22.11@81.661,74.676 81.986,75.001 89.506,75.001 89.916,74.591 89.916,73.566 90.653,72.829 C6.1@90.678,72.829 ; C6.1@90.703,72.829 90.853,72.679 90.853,72.654 91.783,71.724 U1.100@94.64,71.724 94.68,71.764 95.339,71.764 96.019,72.443 96.019,72.638 v1(96.095,72.715) ; v1(92.075,91.313) 93.726,91.313 93.98,91.059 93.98,89.41 94.234,89.156 v1(94.234,89.126) ; v1@94.308,89.08 94.308,88.826 94.615,88.519 C10.2@96.328,88.519 96.326,88.517 96.326,87.309 C4.1@96.295,87.278 ; C4.1@96.324,87.249 96.343,87.23 96.343,85.648 U1.75@96.393,85.598 ; U1.75@96.362,85.446 96.362,84.359 v1(96.774,83.947) 97.362,84.535 U1.73@97.362,85.446 ; R16.2@97.097,59.182 97.154,59.24 97.986,59.24 v1(98.044,59.297) ; R15.2@97.097,60.96 97.16,60.896 98.234,60.896 v1(98.298,60.833) ; R14.2@97.097,62.738 97.16,62.674 98.234,62.674 v1(98.298,62.611) ; R13.2@97.097,64.516 98.952,64.516 99.46,64.008 99.587,64.135 v1(99.695,64.135) ; U1.6@98.862,70.002 98.902,70.042 98.902,70.843 99.433,71.374 101.219,71.374 v1@101.304,71.289 ; v1@101.304,71.374 v1@101.402,71.374 ; U1.11@101.362,70.002 101.402,70.042 101.402,71.303 v1(101.473,71.374) ; v1@101.545,71.446 v1(101.473,71.374) ; v1(104.012,61.723) 104.088,61.8 104.088,61.932 104.971,62.815 R17.2@104.971,62.84 ; v1(104.775,83.439) 106.172,82.042 v1@107.061,82.042 ; R19.2@104.971,59.309 105.034,59.245 106.108,59.245 v1(106.172,59.182) ; R18.2@105.003,60.833 105.633,60.833 105.887,61.087 v1(105.918,61.087) ; U1.21@106.362,70.002 106.782,70.002 U1.22@106.807,69.977 ; U1.22@106.862,70.002 106.902,70.042 106.902,71.342 106.869,71.374 ; 107.548,72.068 106.854,71.374 v1(104.14,71.374) v1(101.473,71.374) ; v1(107.739,80.602) 107.739,81.364 v1(107.079,82.024) v1@107.061,82.042 ; 107.783,72.303 107.866,72.386 ; 107.823,72.263 107.588,72.028 107.588,71.355 107.823,71.12 108.935,71.12 109.189,70.866 v1(109.22,70.866) ; 107.906,72.346 108.204,72.644 108.204,72.724 ; v1(108.585,79.248) 108.585,75.536 108.204,75.155 108.204,72.724 ; U1.28@110.084,72.724 108.204,72.724 ; U1.50@110.084,83.724 108.108,83.724 107.061,82.677 v1@107.061,82.042 ; v1(111.887,63.754) 111.887,63.709 112.21,63.386 R20.2@112.21,62.713 ; v1(112.014,60.198) 112.091,60.275 112.091,60.943 R21.2@112.21,61.062 ; R22.2@112.21,58.852 112.21,58.827 112.36,58.677 112.385,58.677 112.725,58.337 v1(112.725,57.683)
  Bottom Layer w0.2: J25.4@81.28,60.198 81.28,60.452 80.409,61.323 80.409,78.062 83.058,80.711 83.058,82.296 v1(92.075,91.313) ; v1(82.804,53.086) 84.455,51.435 84.455,49.022 J26.4@86.055,47.422 ; v1@83.439,93.599 v1(83.566,93.599) 89.789,93.599 v1(92.075,91.313) ; v1(94.234,89.126) 95.479,90.37 95.479,92.405 95.905,92.832 96.63,92.832 97.404,92.058 97.404,88.779 C1.1@97.398,88.773 97.369,88.744 97.369,87.278 C2.1@97.34,87.249 ; J24.1@94.869,111.506 94.869,108.71 91.948,105.789 91.948,98.669 92.075,98.542 v1(92.075,91.313) ; v1(96.095,72.715) 96.588,72.715 96.684,72.619 99.56,72.619 100.272,71.907 C9.1@100.272,71.882 100.965,71.882 v1(101.473,71.374) ; v1(96.774,83.947) 97.139,83.582 97.139,83.328 97.428,83.039 104.375,83.039 v1(104.775,83.439) ; v1(98.044,59.297) 98.044,60.471 98.298,60.725 v1(98.298,60.833) v1(98.298,62.611) 98.309,62.622 98.69,62.622 99.695,63.627 v1@99.695,63.881 ; v1(99.695,64.135) v1@99.695,63.881 ; v1@104.012,61.722 104.013,61.722 104.648,61.087 v1(105.918,61.087) 105.918,60.979 106.172,60.725 v1(106.172,59.182) 107.594,57.76 v1@112.725,57.76 ; v1(104.012,61.723) 101.853,61.723 v1@99.695,63.881 ; v1(104.14,71.374) 104.579,71.813 105.352,71.813 C8.1@105.41,71.755 ; C8.1@105.41,71.813 C7.1@106.553,71.813 ; v1(108.585,79.248) 108.585,79.756 v1(107.739,80.602) 107.739,80.688 108.585,81.534 C5.1@109.405,81.534 ; v1(109.22,70.866) 111.887,68.199 v1(111.887,63.754) 111.95,63.691 111.95,60.261 v1(112.014,60.198) 112.776,59.436 112.776,57.81 v1@112.725,57.76 ; MD10.4@124.46,108.585 124.46,109.033 124.928,109.501 125.357,109.501 125.368,109.512 126.092,109.512 126.103,109.501 126.627,109.501 126.638,109.512 127.362,109.512 127.373,109.501 127.897,109.501 127.908,109.512 128.632,109.512 128.643,109.501 132.637,109.501 133.731,108.407 133.731,106.375 133.579,106.223 133.02,106.223 132.706,105.909 132.706,102.677 132.902,102.481 132.917,102.481 133.096,102.302 MD9.4@133.096,101.854 133.096,100.66 133.782,99.974 133.782,98.196 133.629,98.044 133.096,98.044 132.715,97.663 132.715,94.314 132.8,94.229 132.917,94.229 133.096,94.05 MD8.4@133.096,93.602 133.127,93.57 133.127,92.298 133.756,91.669 133.756,89.865 133.604,89.713 133.147,89.713 132.715,89.281 132.715,86.061 132.8,85.977 132.917,85.977 133.096,85.798 MD7.4@133.096,85.349 ; MD1.4@125.222,37.592 125.222,38.04 125.043,38.219 124.754,38.219 ; MD2.4@133.096,44.087 MD2.4@132.867,44.316 ; MD4.4@133.096,60.592 133.096,61.041 132.917,61.22 132.749,61.22 132.659,61.309 132.659,61.429 132.664,61.434 132.664,64.465 133.198,64.999 133.604,64.999 133.785,65.18 133.785,65.739 133.796,65.75 133.796,66.33 133.785,66.341 133.785,66.951 133.096,67.64 MD5.4@133.096,68.834 ; MD5.4@133.096,68.844 132.613,69.327 132.613,72.746 133.201,73.333 133.57,73.333 133.731,73.494 133.731,75.311 133.096,75.946 MD6.4@133.096,77.089 ; MD6.4@133.096,77.097 133.096,77.545 132.917,77.724 132.825,77.724 132.698,77.851 132.698,81.06 133.147,81.509 133.646,81.509 133.731,81.593 133.731,83.178 133.575,83.334 133.575,83.35 133.458,83.467 133.442,83.467 133.096,83.813 MD7.4@133.096,85.344 ; MD4.4@133.223,60.198 133.096,60.071 133.096,59.309 133.785,58.62 133.785,58.086 133.796,58.075 133.796,57.037 133.502,56.744 133.045,56.744 132.639,56.338 132.639,53.23 132.902,52.967 132.917,52.967 133.096,52.788 133.096,51.029 133.756,50.368 133.756,48.548 133.672,48.463 133.223,48.463 132.867,48.108 MD2.4@132.867,44.316 ; v1@112.725,57.76 v1(112.725,57.683) 112.725,41.834 113.919,40.64 117.953,40.64 120.374,38.219 124.754,38.219 ; 124.754,38.219 124.754,38.398 124.943,38.586 124.943,41.681 125.222,41.961 125.654,41.961 125.854,42.161 125.854,44.142 126.67,44.958 132.225,44.958 MD2.4@132.867,44.316
5V: J26.3